# Altium PCB main.PcbDoc
Units mm, origin at the board's own origin, x right, y up, seen from the top; angles counter-clockwise.
Board outline 73 x 13.5 mm, 2 copper layers (Top Layer, Bottom Layer); 1 components, 3 nets, 8 pads, 2 vias.
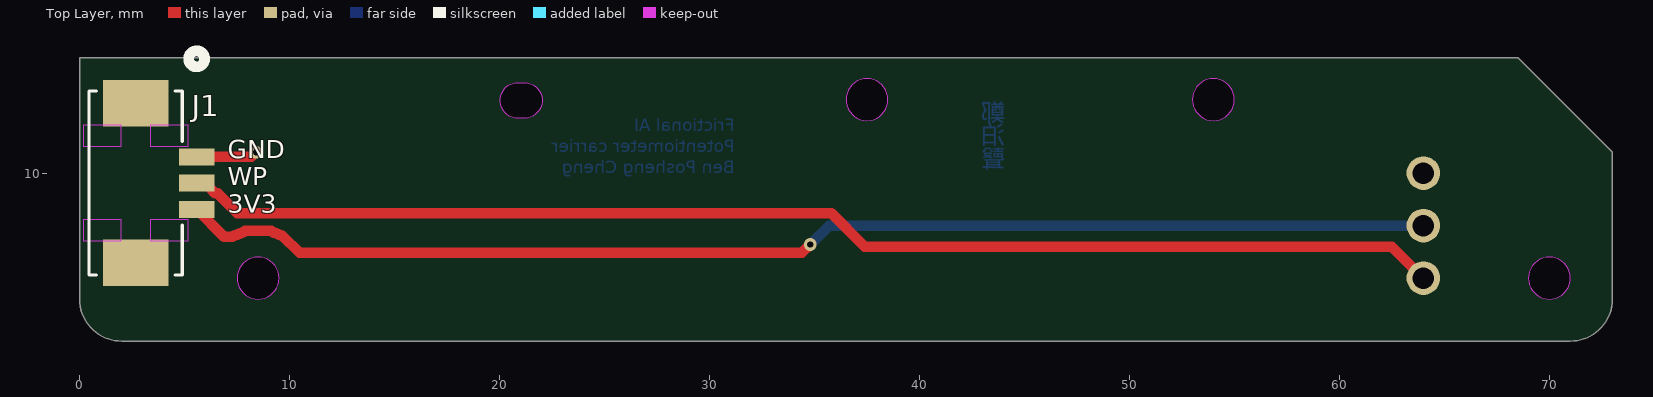
[diagram p0: Top Layer view]
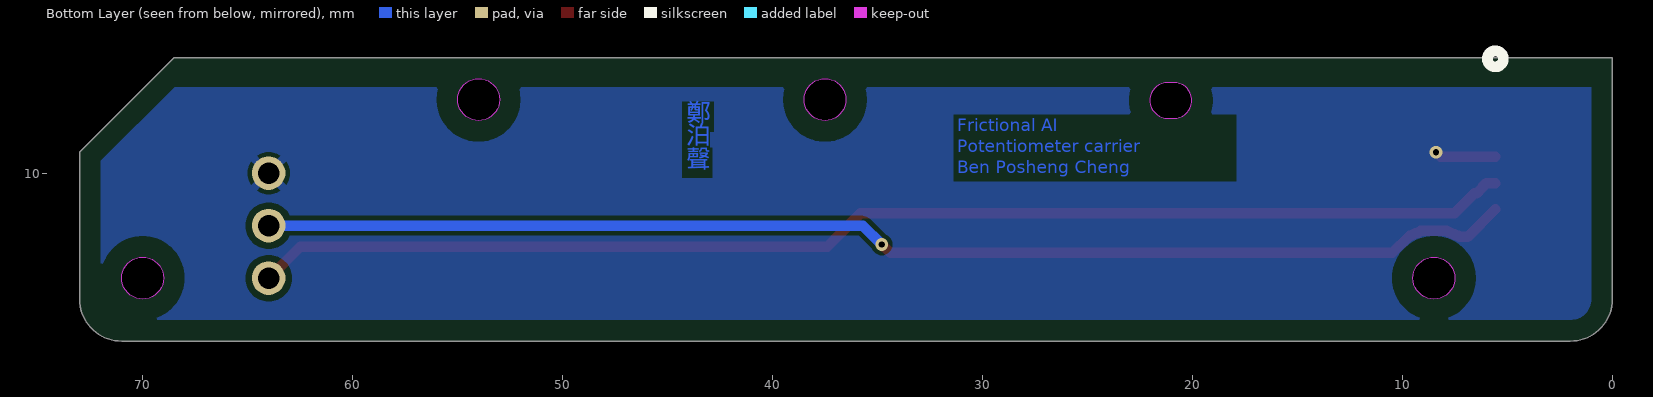
[diagram p1: Bottom Layer view, seen from below]

## Layer stack, top to bottom
Top Solder: solder mask 0.0102, Solder Resist, Dk 3.5
Top Layer: signal copper 0.0356
Dielectric 1: dielectric 0.32, FR-4, Dk 4.8
Bottom Layer: signal copper 0.0356
Bottom Solder: solder mask 0.0102, Solder Resist, Dk 3.5

## Board outline
2,2 71,2 ccw(c71,4) 73,4 73,11 68.5,15.5 0,15.5 0,4 ccw(c2,4)
cut-out: 20.875,12.614 cw(c20.875,13.464) 20.875,14.314 21.175,14.314 cw(c21.175,13.464) 21.175,12.614
cut-out: 53,13.5 ccw(c54,13.5) 54,12.5 ccw(c54,13.5) 55,13.5 ccw(c54,13.5) 54,14.5 ccw(c54,13.5)
cut-out: 36.5,13.5 ccw(c37.5,13.5) 37.5,12.5 ccw(c37.5,13.5) 38.5,13.5 ccw(c37.5,13.5) 37.5,14.5 ccw(c37.5,13.5)
cut-out: 7.5,5 ccw(c8.5,5) 8.5,4 ccw(c8.5,5) 9.5,5 ccw(c8.5,5) 8.5,6 ccw(c8.5,5)
cut-out: 69,5 ccw(c70,5) 70,4 ccw(c70,5) 71,5 ccw(c70,5) 70,6 ccw(c70,5)

## Design rules (kind name [scope] priority, off if disabled: settings)
BoardOutlineClearance [All] p1: gap=1 ignorepadtopadclearanceinfootprint=FALSE
Clearance [All] p1: gap=0.2 ignorepadtopadclearanceinfootprint=TRUE except(0.1: Track-Track Track-SMDPad; 0.15: SMDPad-SMDPad; 0.28: Track-THPad Track-Hole; 0.3: THPad-Fill THPad-Poly THPad-Region; 0.45: THPad-THPad)
HoleSize [All] p1: absolutevalues=TRUE maxlimit=6.3 minlimit=0.15 maxpercent=80.000 minpercent=20.000
MinimumAnnularRing [not isvia] p1: minimumring=0.2
MinimumSolderMaskSliver [All] p1: minsoldermaskwidth=0.1
PlaneClearance [All] p1: clearance=0.3
PlaneConnect [All] p1: planeconnectstyle=Direct reliefexpansion=0.508 reliefentries=4 reliefconductorwidth=0.254 reliefairgap=0.254
PolygonConnect PolygonConnect_PWR [InNet('VBUS') or InNet('VH') or InNet('GND')] p1: thpad.connectstyle=Relief thpad.reliefconductorwidth=0.4 thpad.reliefentries=4 thpad.polygonreliefangle="90 Angle" thpad.airgapwidth=0.2 thpad.conductorbypadedge=TRUE thpad.mindistance=0.381 thpad.enablemindistance=FALSE smdpad.connectstyle=Relief smdpad.reliefconductorwidth=0.4 smdpad.reliefentries=4 smdpad.polygonreliefangle="90 Angle" smdpad.airgapwidth=0.2 via.connectstyle=Direct via.reliefconductorwidth=0.254 via.reliefentries=4 via.polygonreliefangle="90 Angle" via.airgapwidth=0.254
PolygonConnect PolygonConnect_3V3 [InNet('3V3')] p2: thpad.connectstyle=Relief thpad.reliefconductorwidth=0.254 thpad.reliefentries=4 thpad.polygonreliefangle="90 Angle" thpad.airgapwidth=0.254 smdpad.connectstyle=Relief smdpad.reliefconductorwidth=0.45 smdpad.reliefentries=4 smdpad.polygonreliefangle="45 Angle" smdpad.airgapwidth=0.2 smdpad.conductorbypadedge=TRUE smdpad.mindistance=0.381 smdpad.enablemindistance=FALSE via.connectstyle=Direct via.reliefconductorwidth=0.254 via.reliefentries=4 via.polygonreliefangle="90 Angle" via.airgapwidth=0.254
PolygonConnect [All] p3: thpad.connectstyle=Relief thpad.reliefconductorwidth=0.254 thpad.reliefentries=4 thpad.polygonreliefangle="90 Angle" thpad.airgapwidth=0.254 smdpad.connectstyle=Relief smdpad.reliefconductorwidth=0.254 smdpad.reliefentries=4 smdpad.polygonreliefangle="90 Angle" smdpad.airgapwidth=0.254 smdpad.conductorbypadedge=TRUE smdpad.mindistance=0.381 smdpad.enablemindistance=FALSE via.connectstyle=Direct via.reliefconductorwidth=0.254 via.reliefentries=4 via.polygonreliefangle="90 Angle" via.airgapwidth=0.254
RoutingVias [All] p1: holewidth=0.3 width=0.5 viastyle="Through Hole" minholewidth=0.15 minwidth=0.25 maxholewidth=0.711 maxwidth=1.27
SilkToSilkClearance [All] p1: silktosilkclearance=0
SilkToSolderMaskClearance [IsPad] p1: minsilkscreentomaskgap=0.15 clearancetoexposedcopper=FALSE
SolderMaskExpansion SolderMaskExpansionVia [IsVia] p1: expansion=0 istentingtop=TRUE
SolderMaskExpansion [All] p2: expansion=0 istentingtop=FALSE
SupplyNets "Schematic Supply Nets_3" [InNet('3V3')] p1: voltage=0.000
SupplyNets "Schematic Supply Nets" [InNet('GND')] p2: voltage=0.000
Width [All] p1: maxlimit=1 minlimit=0.1 preferedwidth=0.2
24 further rules are at their usual default settings.

## Components (designator, comment, footprint, x,y, rotation, side; value= is the part's Value field where it differs from the comment)
J1 "532610371" CONN_532610001-SD_03_MOL 2.667,9.525 r90 top

## Footprints (in the part's own frame and the unit in brackets; to place one, negate y for a bottom-side part, rotate by r counter-clockwise, add the part's x,y. Pads: shape width x height; smd on the part's side, far side on the other; paste and mask are expansions set on the pad)
CONN_532610001-SD_03_MOL [mil]
  rect 32x67 smd paste+0 mask+0: 1(49.21,-114.35) 2(0,-114.35) 3(-49.21,-114.35)
  rect 87x122 smd paste+0 mask+0: 4(-149.61,-0.18) 5(149.61,-0.18)
  Top Layer keep-out region: 108.08,-27.67 69.08,-27.67 69.08,-98.67 108.08,-98.67
  Top Layer keep-out region: -69.08,-27.67 -108.08,-27.67 -108.08,-98.67 -69.08,-98.67
  Top Layer keep-out region: 108.08,98.31 69.08,98.31 69.08,27.32 108.08,27.32
  Top Layer keep-out region: -69.08,98.31 -108.08,98.31 -108.08,27.31 -69.08,27.31
  silkscreen extent -172,-129 248,88, body extent -175,-127 175,77, height 126

## Part data
J1: "1.25mm Pitch, PicoBlade PCB Header, Single Row, Right-Angle, Surface Mount, Tin (Sn) Plating, Friction Lock, 3 Circuits, Natural, Tape and Reel", Manufacturer_Name="Molex Connector Corporation", Copyright="Copyright (C) 2025 Ultra Librarian. All rights reserved.", Manufacturer_Part_Number=532610371, RefDes=RefDes, Type=Type

## Free pads (board coordinates)
  round 1.6 hole 1.02: TP27(64,5) TP28(64,7.5) TP29(64,10)

## Via types
v1: diameter 0.6, hole 0.3, Top Layer to Bottom Layer, tented both sides, 2 vias

## Nets (pads, with @x,y where several pads share a name; then routed paths per layer and width w, separated by ;. In a path a pad name is that pad's centre, name@x,y a point inside that pad or via, vN(x,y) a via of type N, cw(c..) or ccw(c..) an arc to the next point about the centre after c; other vN are vias at no path point)
3V3: J1.3 pad.TP28 | length 60
  Top Layer w0.5: J1.3 6.887,6.959 7.094,6.959 7.277,6.959 7.345,7.027 ccw(c7.309,7.525) 7.593,7.114 ccw(c7.429,7.586) 7.647,7.136 ccw(c7.556,7.628) 7.884,7.25 9.116,7.25 ccw(c9.444,7.628) 9.22,7.181 ccw(c9.444,7.628) 9.289,7.152 9.366,7.127 9.407,7.114 ccw(c9.691,7.525) 9.655,7.027 10.482,6.2 34.4,6.2 v1(34.8,6.6)
  Bottom Layer w0.5: v1(34.8,6.6) 35.7,7.5 pad.TP28
GND: J1.1 pad.TP29 | length 2.9
  Top Layer w0.5: J1.1 8.175,10.775 v1(8.4,11)
wipe: J1.2 pad.TP27 | length 60.3
  Top Layer w0.5: J1.2 6.016,9.525 6.172,9.369 6.172,9.324 6.465,9.031 6.567,9.031 7.499,8.1 35.8,8.1 37.4,6.5 62.5,6.5 pad.TP27
pads on no net: J1.4 J1.5

## Polygon pours and split planes (outlines as drawn)
GND on Bottom Layer "NONET_L01_P-001" (solid, pour order 0): 0,15.2 0,2 72.9,2 73,1.9 73,15.3

## Other copper
Bottom Layer:
  text "鄭" at 44.1,12.178 h1.5
  text "泊" at 44.1,11.112 h1.5
  text "聲" at 44.1,9.973 h1.5
  text "Frictional AI / Potentiometer carrier / Ben Posheng Cheng" at 31.2,9.8 h1

## Silkscreen, mask and mechanical layers (free items; w line width, h text height)
Top Overlay:
  text "GND" at 7.05,10.431 h1.5
  text "WP" at 7.051,9.145 h1.5
  text "3V3" at 7.05,7.831 h1.5
Bottom Solder:
  text "鄭" at 44.1,12.18 h1.5
  text "泊" at 44.1,11.114 h1.5
  text "聲" at 44.1,9.975 h1.5
  text "Frictional AI / Potentiometer carrier / Ben Posheng Cheng" at 31.2,9.802 h1
Mechanical 1:
  lines w0.2: 12.8,13.5 68.4,13.5 ; 21,11.2 21,18.9 ; 37.5,2.1 37.5,23.2 ; 54,11.3 54,17.9
Board Shape:
  lines w0.2: 0,4 ccw(c2,4) 2,2 71,2 ccw(c71,4) 73,4 73,11 68.5,15.5 0,15.5 0,4 ; 7.5,5 cw(c8.5,5) 8.5,6 cw(c8.5,5) 9.5,5 cw(c8.5,5) 8.5,4 cw(c8.5,5) 7.5,5 ; 20.875,12.614 cw(c20.875,13.464) 20.875,14.314 21.175,14.314 cw(c21.175,13.464) 21.175,12.614 20.875,12.614 ; 36.5,13.5 cw(c37.5,13.5) 37.5,14.5 cw(c37.5,13.5) 38.5,13.5 cw(c37.5,13.5) 37.5,12.5 cw(c37.5,13.5) 36.5,13.5 ; 53,13.5 cw(c54,13.5) 54,14.5 cw(c54,13.5) 55,13.5 cw(c54,13.5) 54,12.5 cw(c54,13.5) 53,13.5 ; 69,5 cw(c70,5) 70,6 cw(c70,5) 71,5 cw(c70,5) 70,4 cw(c70,5) 69,5

## Dimensions
21,18.9 to 37.5,23.2 on Mechanical 1
37.5,23.2 to 54,17.9 on Mechanical 1
64,7.5 to 68.4,13.5 on Mechanical 1
64,5 to 37.5,2.1 on Mechanical 1